# Altium PCB PCB1.PcbDoc (part 1 of 2)
Units mm, origin at the board's own origin, x right, y up, seen from the top; angles counter-clockwise.
Board outline 30.3 x 30 mm, 4 copper layers (Top Layer, Layer 1, Layer 2, Bottom Layer), stack 1.52 mm thick; 94 components, 80 nets, 362 pads, 126 vias.
Unrouted connection lines stored in the file: 75.
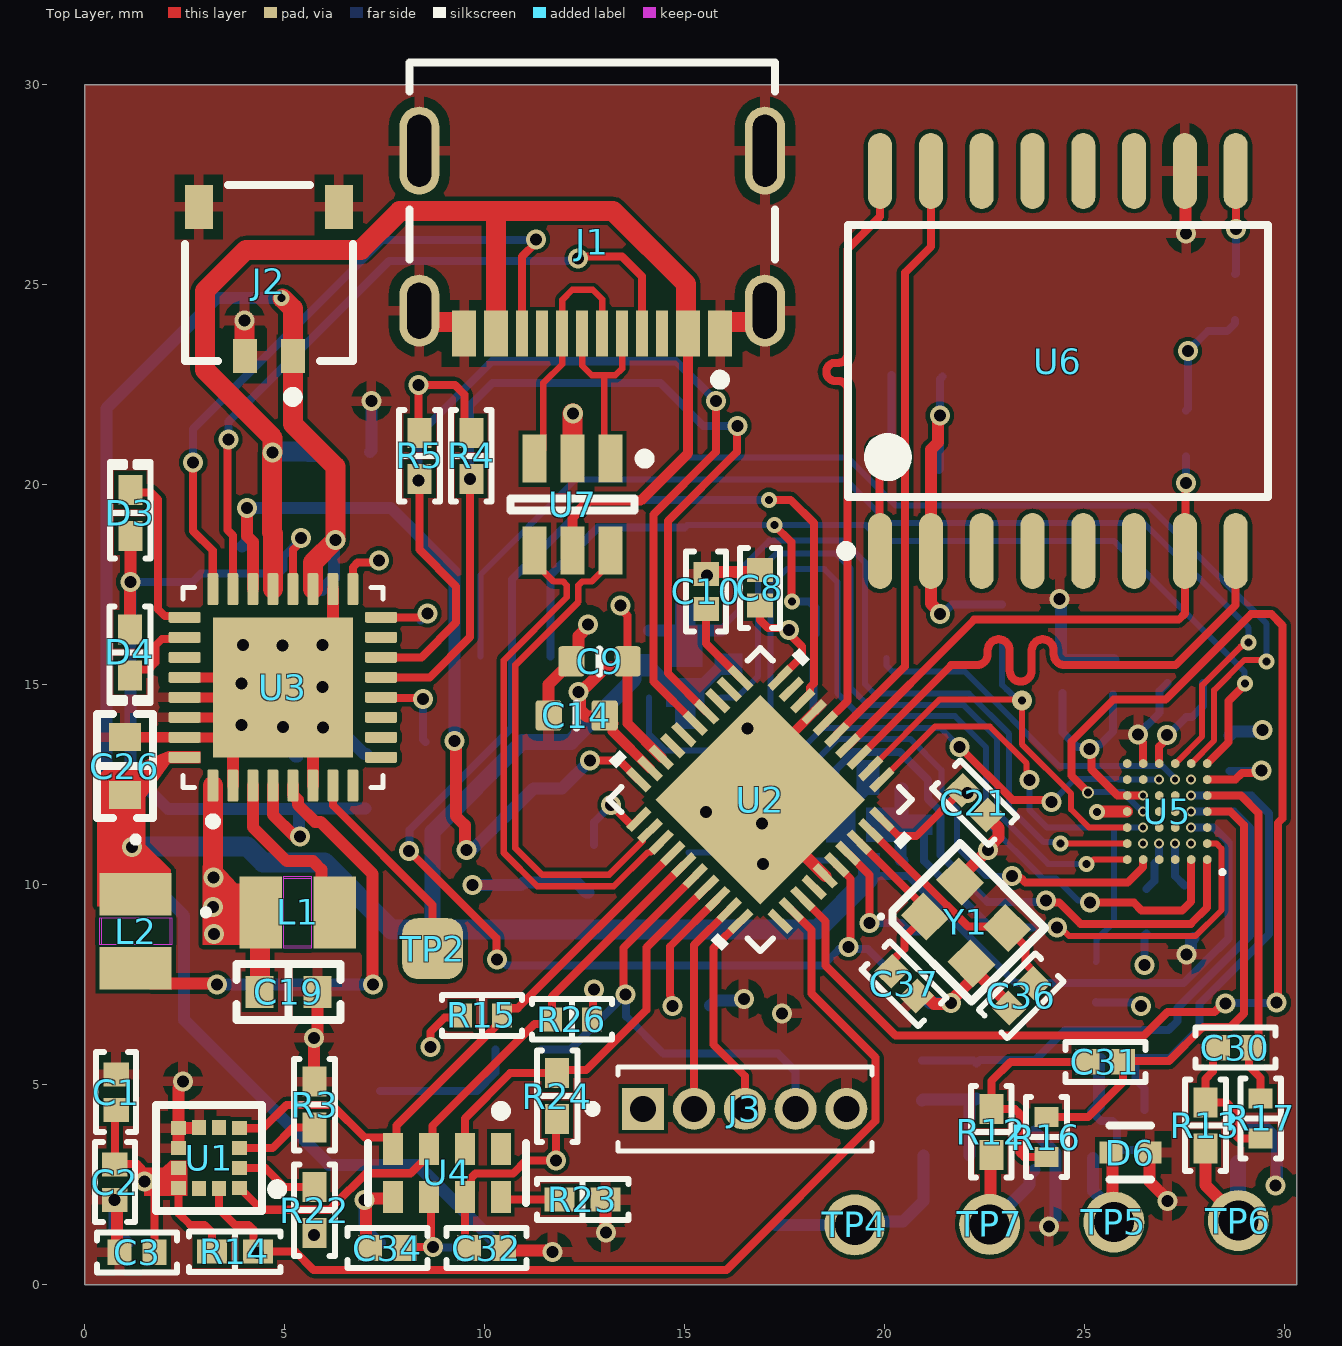
[diagram p0: Top Layer view]
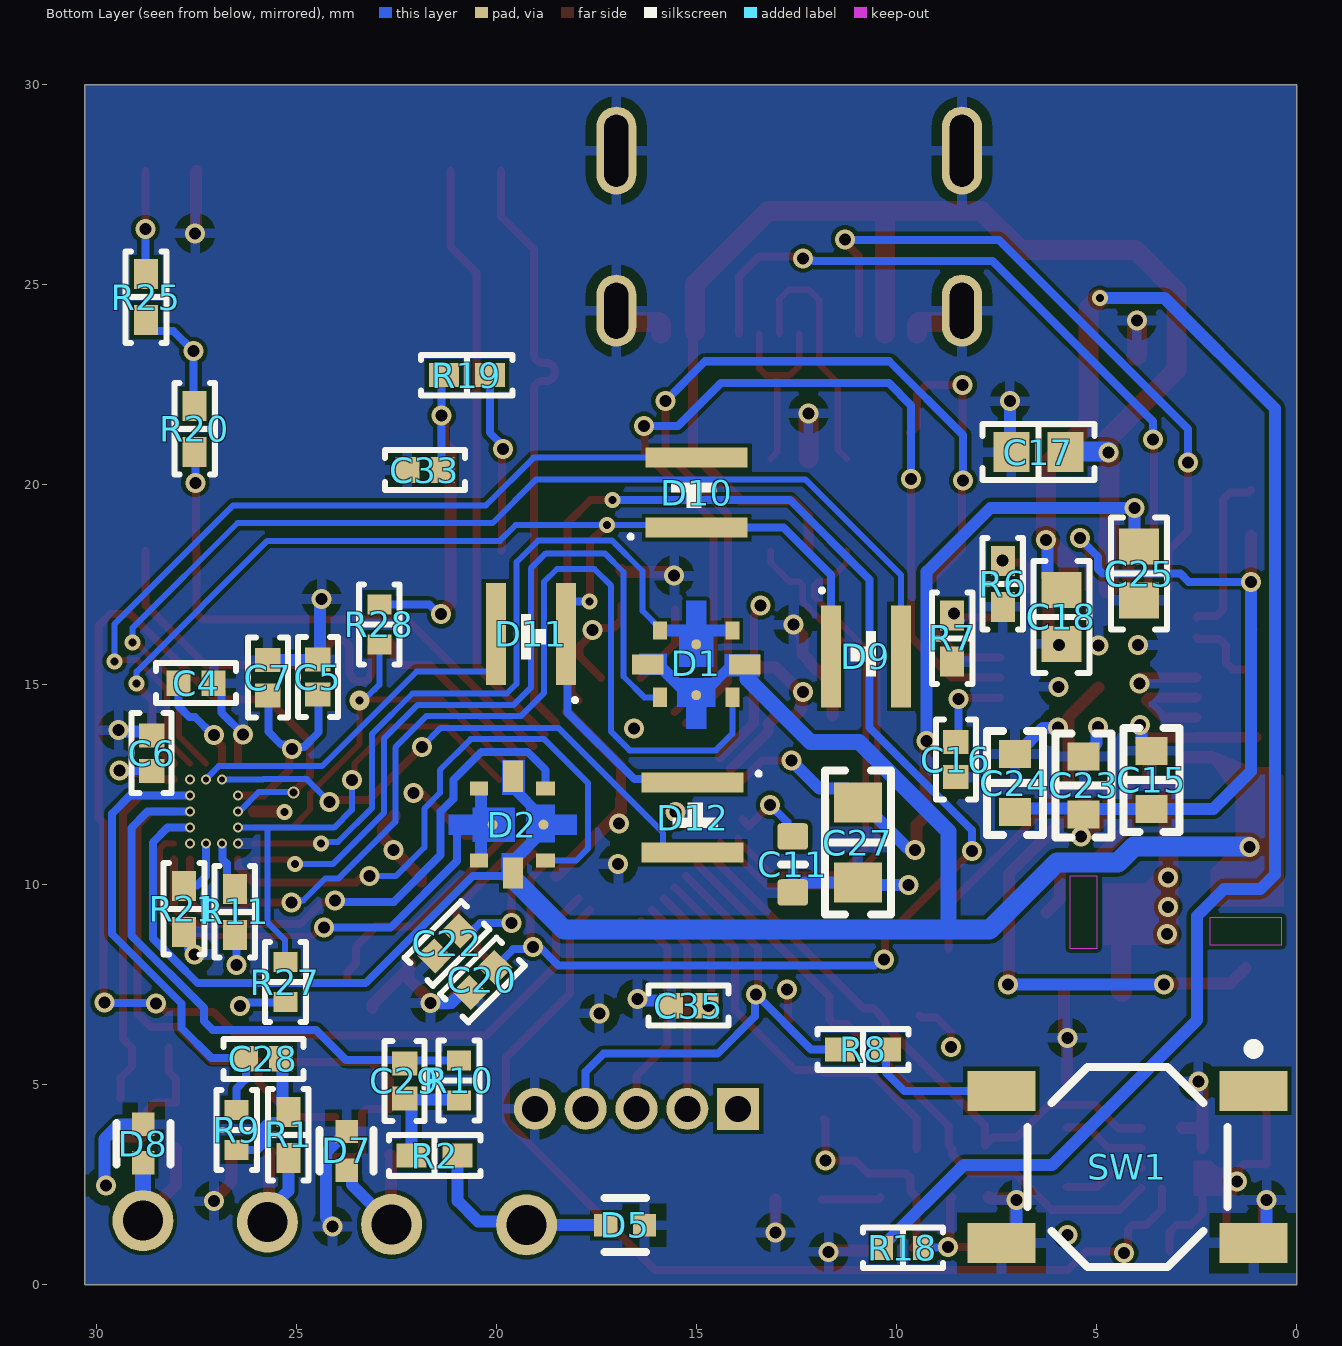
[diagram p1: Bottom Layer view, seen from below]
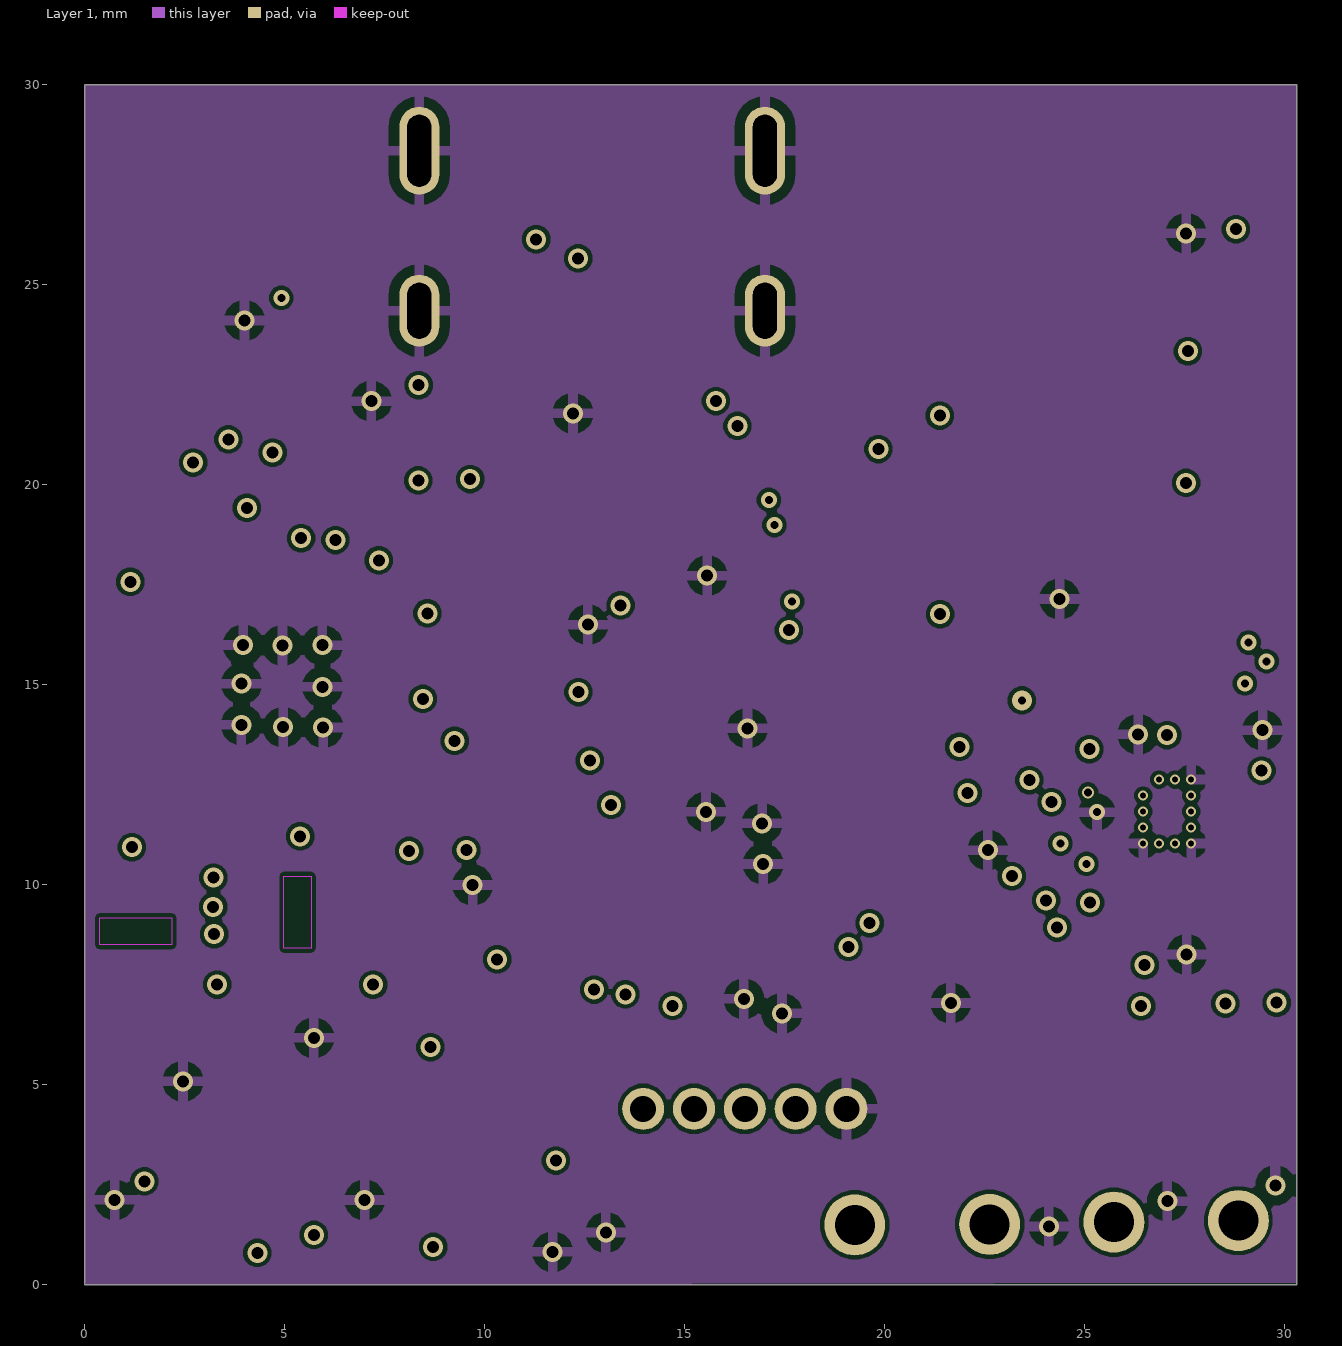
[diagram p2: Layer 1]
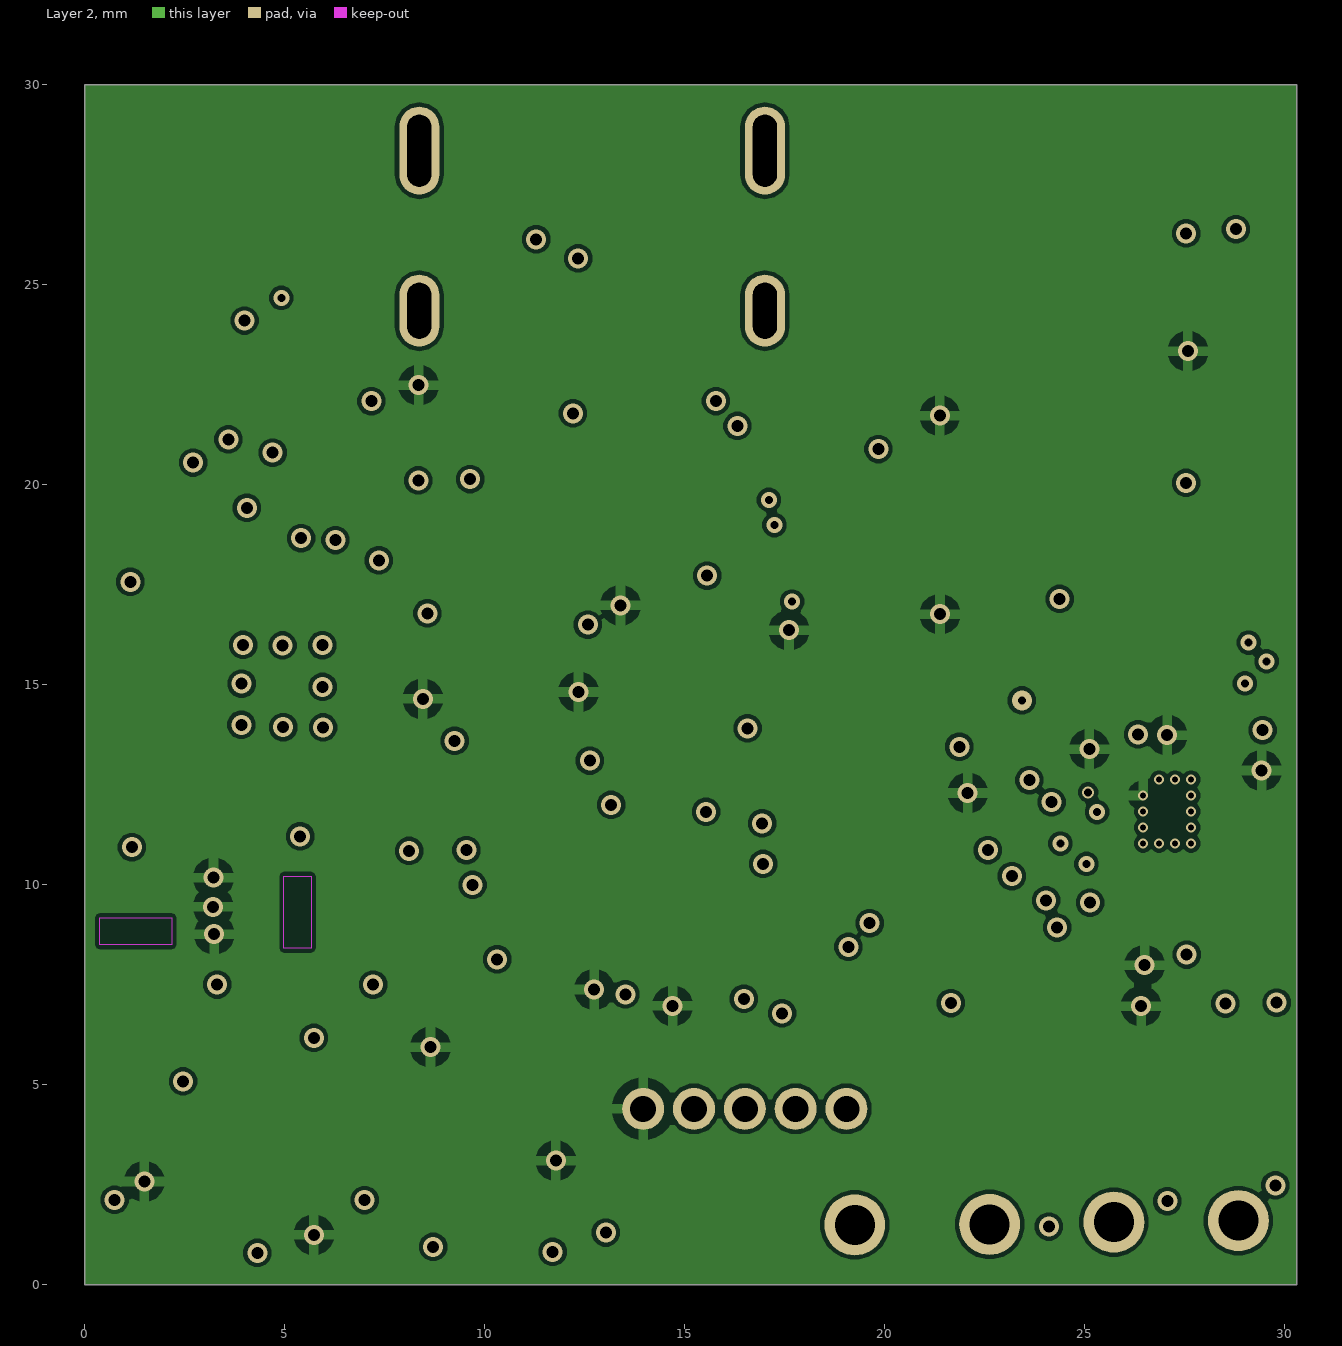
[diagram p3: Layer 2]

## Layer stack, top to bottom
Top Solder: solder mask 0.0102, Solder Resist, Dk 3.5
Top Layer: signal copper 0.035
Dielectric 2: prepreg 0.21, PP-006, Dk 4.1
Layer 1: signal copper 0.015
Dielectric 1: dielectric 1, FR-4, Dk 4.8
Layer 2: signal copper 0.015
Dielectric 3: prepreg 0.21, PP-006, Dk 4.1
Bottom Layer: signal copper 0.035
Bottom Solder: solder mask 0.0102, Solder Resist, Dk 3.5

## Board outline
0,0 30.3,0 30.3,30 0,30

## Design rules (kind name [scope] priority, off if disabled: settings)
Clearance [All] p1: gap=0.1 ignorepadtopadclearanceinfootprint=FALSE except(0.09: Arc-SMDPad Track-SMDPad SMDPad-SMDPad)
ComponentClearance [All] p1: gap=0.102 collisioncheckmode=3 verticalgap=0.102 showdistances=FALSE
DiffPairsRouting [All] p1: maxlimit=0.254 minlimit=0.114 mostfreqgap=0.254 toplayer_maxgap=0.14 toplayer_prefgap=0.127 toplayer_minwidth=0.161 toplayer_maxwidth=0.17 toplayer_prefwidth=0.161 midlayer1_mingap=0.254 midlayer1_minwidth=0.381 midlayer1_maxwidth=0.381 midlayer1_prefwidth=0.381 midlayer2_mingap=0.254 midlayer2_minwidth=0.381 midlayer2_maxwidth=0.381 midlayer2_prefwidth=0.381 bottomlayer_mingap=0.254 bottomlayer_minwidth=0.381 bottomlayer_maxwidth=0.381 bottomlayer_prefwidth=0.381 maxuncoupledlength=12.7
HoleToHoleClearance [All] p1: gap=0.2 allowstackedmicrovias=TRUE
MinimumSolderMaskSliver [All] p1: minsoldermaskwidth=0.1
PolygonConnect [All] p1: connectstyle=Relief reliefconductorwidth=0.254 reliefentries=4 polygonreliefangle="90 Angle" airgapwidth=0.254
RoutingVias microVIa [IsMicroVia] p1: holewidth=0.15 width=0.25 viastyle="Through Hole" minholewidth=0.711 minwidth=1.27 maxholewidth=0.711 maxwidth=1.27
RoutingVias [All] p2: holewidth=0.3 width=0.4 viastyle="Through Hole" minholewidth=0.15 minwidth=0.25 maxholewidth=6.3 maxwidth=7
SilkToSolderMaskClearance [IsPad] p1: minsilkscreentomaskgap=0.1 clearancetoexposedcopper=TRUE
SolderMaskExpansion [All] p1: expansion=0.01 istentingtop=FALSE
SupplyNets "Schematic Supply Nets_4" [InNet('GND')] p1: voltage=0.000
SupplyNets "Schematic Supply Nets_6" [InNet('VBUSOUT')] p2: voltage=0.000
SupplyNets "Schematic Supply Nets_5" [InNet('+5V')] p3: voltage=0.000
SupplyNets "Schematic Supply Nets_3" [InNet('VBAT')] p4: voltage=0.000
SupplyNets "Schematic Supply Nets_2" [InNet('+1.8V_Acc')] p5: voltage=0.000
SupplyNets "Schematic Supply Nets_1" [InNet('V_LED')] p6: voltage=0.000
SupplyNets "Schematic Supply Nets" [InNet('VSYS')] p7: voltage=0.000
Width [All] p1: maxlimit=7 minlimit=0.1 preferedwidth=0.254
25 further rules are at their usual default settings.

## Classes and differential pairs
component class U_Sensors: C1 C2 C3 C4 C5 C6 C7 C28 C29 C30 C31 D1 D2 D5 D6 D7 D8 D9 D10 D11 D12 R1 R2 R3 R9 R10 R11 R12 R13 R14 R15 R16 R17 R21 R22 R26 R27 R28 TP4 TP5 TP6 TP7 U1 U5
component class U_Power: C15 C16 C17 C18 C19 C23 C24 C25 C26 D3 D4 J2 L1 L2 R4 R5 R6 R7 TP2 U3
component class U_MCU: C8 C9 C10 C11 C14 C20 C21 C22 C27 C32 C33 C34 C35 C36 C37 J1 J3 R8 R18 R19 R20 R23 R24 R25 SW1 U2 U4 U6 U7 Y1

## Components (designator, comment, footprint, x,y, rotation, side; value= is the part's Value field where it differs from the comment)
C1 "0.1 µF" "CAP 0402_1005"#1 0.785,4.812 r270 top
C2 "10 µF" "CAP 0402_1005"#1 0.753,2.561 r90 top
C3 "0.1 µF" "CAP 0402_1005"#1 1.311,0.809 r180 top
C4 "0.1 µF" "CAP 0402_1005"#1 27.516,15.039 r0 bottom
C5 "0.1 µF" "CAP 0402_1005"#1 24.468,15.19 r270 bottom
C6 "0.1 µF" "CAP 0402_1005"#1 28.626,13.287 r270 bottom
C7 "1 µF" "CAP 0402_1005"#1 25.72,15.174 r270 bottom
C8 "0.1 µF" "CAP 0402_1005"#2 16.883,17.422 r270 top
C9 "Capacitor 1µF +/-40% 50V 0603" CAPC0603(1608)100_L 12.871,15.581 r0 top value=4.7uF
C10 "0.1 µF" "CAP 0402_1005"#2 15.535,17.331 r270 top
C11 "Capacitor 1µF +/-40% 50V 0603" CAPC0603(1608)100_L 12.597,10.505 r90 bottom value=4.7uF
C14 "Capacitor 1µF +/-40% 50V 0603" CAPC0603(1608)100_L 12.298,14.229 r0 top value=4.7uF
C15 "10 µF" "MURATA GRT188 0603_1608" 3.624,12.621 r270 bottom
C16 "0.1 µF" "CAP 0402_1005"#1 8.519,13.125 r90 bottom
C17 "1µF" "CAP 0603_1608" 6.457,20.814 r180 bottom
C18 "2.2 µF" "CAP 0603_1608" 5.884,16.697 r90 bottom
C19 "10 µF" "MURATA GRT188 0603_1608" 5.097,7.322 r180 top
C20 "100pF" "CAP 0402_1005"#1 20.356,7.619 r135 bottom
C21 "0.1 µF" "CAP 0402_1005"#1 22.248,12.049 r135 top
C22 "0.1 µF" "CAP 0402_1005"#1 21.24,8.53 r135 bottom
C23 "10 µF" "MURATA GRT188 0603_1608" 5.325,12.48 r270 bottom
C24 "10 µF" "MURATA GRT188 0603_1608" 7.043,12.541 r270 bottom
C25 "1µF" "CAP 0603_1608" 3.939,17.777 r90 bottom
C26 "10 µF" "MURATA GRT188 0603_1608" 1.009,12.961 r270 top
C27 "4.7 µF" "MURATA GRM188 0603_1608" 10.97,11.054 r90 bottom
C28 "0.047 µF" "CAP 0402_1005"#1 25.832,5.647 r180 bottom
C29 "0.047 µF" "CAP 0402_1005"#1 22.299,5.092 r270 bottom
C30 "0.047 µF" "CAP 0402_1005"#1 28.771,5.925 r180 top
C31 "0.047 µF" "CAP 0402_1005"#1 25.517,5.569 r180 top
C32 "0.1 µF" "CAP 0402_1005"#1 10.047,0.915 r180 top
C33 "0.1 µF" "CAP 0402_1005"#1 21.793,20.366 r180 bottom
C34 "0.1 µF" "CAP 0402_1005"#1 7.574,0.915 r0 top
C35 "0.1 µF" "CAP 0402_1005"#1 15.198,6.973 r180 bottom
C36 "12 pF" "CAP 0402_1005"#1 23.416,7.224 r45 top
C37 "12 pF" "CAP 0402_1005"#1 20.486,7.524 r135 top
D1 "SFH 7018A" "SFH 7018A-Footprint-1" 15.01,15.5 r180 bottom
D2 "SFH 7018A" "SFH 7018A-Footprint-1" 19.592,11.5 r90 bottom
D3 "Blue" "LED 0402_1005 GREEN" 1.14,19.293 r90 top value=Green
D4 "Green" "LED 0402_1005 GREEN" 1.133,15.808 r270 top
D5 "PGB1010402KR" FP-PGB1-0402-MFG 16.785,1.486 r0 bottom value=0.04pF
D6 "PGB1010402KR" FP-PGB1-0402-MFG 26.142,3.303 r180 top value=0.04pF
D7 "PGB1010402KR" FP-PGB1-0402-MFG 23.75,3.345 r270 bottom value=0.04pF
D8 "PGB1010402KR" FP-PGB1-0402-MFG 28.831,3.527 r270 bottom value=0.04pF
D9 "SFH2705" DFN175P215X60-2N 10.77,15.706 r180 bottom
D10 "SFH2705" DFN175P215X60-2N 15,19.8 r90 bottom
D11 "SFH2705" DFN175P215X60-2N 19.143,16.263 r0 bottom
D12 "SFH2705" DFN175P215X60-2N 15.1,11.675 r270 bottom
J1 "217179-0001" FP-2171790001-MFG 12.687,27.2 r180 top locked
J2 "BM02B-ACHLKS-GAN-ETF(LF)(SN)" FP-BM02B-ACHLKS-GAN-ETF_L-MFG 4.603,25.295 r270 top
J3 "M50-3530542" HARWIN_M50-3530542 16.504,4.395 r0 top
L1 "CIGT201610EH2R2MNE" IND_CIGT2016_SAM 5.327,9.308 r0 top
L2 "CIGT201610EH2R2MNE" IND_CIGT2016_SAM 1.275,8.835 r270 top
R1 "5.1 kOhms" "RES 0402_1005" 25.21,3.746 r270 bottom
R2 "5.1 kOhms" "RES 0402_1005" 21.549,3.227 r180 bottom
R3 "10 kOhms" "RES 0402_1005" 5.746,4.502 r90 top
R4 "10 kOhms" "RES 0402_1005" 9.666,20.719 r270 top
R5 "10 kOhms" "RES 0402_1005" 8.372,20.717 r270 top
R6 "47 kOhms" "RES 0402_1005" 7.344,17.519 r90 bottom
R7 "47 kOhms" "RES 0402_1005" 8.611,16.155 r90 bottom
R8 "10 kOhms" "RES 0402_1005" 10.841,5.879 r0 bottom
R9 "100 kOhms" "YAGEO RES 0402_1005" 26.501,3.868 r270 bottom
R10 "100 kOhms" "YAGEO RES 0402_1005" 20.94,5.106 r270 bottom
R11 "10 kOhms" "RES 0402_1005" 26.547,9.321 r270 bottom
R12 "5.1 kOhms" "RES 0402_1005" 22.667,3.822 r270 top
R13 "5.1 kOhms" "RES 0402_1005" 28.021,3.982 r270 top
R14 "10 kOhms" "RES 0402_1005" 3.753,0.826 r180 top
R15 "4.7 kOhms" "YAGEO RES 0402_1005" 9.932,6.729 r180 top
R16 "100 kOhms" "YAGEO RES 0402_1005" 24.045,3.687 r270 top
R17 "100 kOhms" "YAGEO RES 0402_1005" 29.4,4.155 r270 top
R18 "1 kOhms" "YAGEO RES 0402_1005" 9.845,0.919 r180 bottom
R19 "10 kOhms" "RES 0402_1005" 20.745,22.735 r0 bottom
R20 "10 kOhms" "RES 0402_1005" 27.548,21.393 r90 bottom
R21 "10 kOhms" "RES 0402_1005" 27.815,9.396 r90 bottom
R22 "10 kOhms" "RES 0402_1005" 5.746,1.864 r90 top
R23 "10 kOhms" "RES 0402_1005" 12.45,2.13 r180 top
R24 "10 kOhms" "RES 0402_1005" 11.815,4.711 r90 top
R25 "10 kOhms" "RES 0402_1005" 28.765,24.685 r90 bottom
R26 "4.7 kOhms" "YAGEO RES 0402_1005" 12.183,6.633 r0 top
R27 "4.7 kOhms" "YAGEO RES 0402_1005" 25.28,7.561 r270 bottom
R28 "4.7 kOhms" "YAGEO RES 0402_1005" 22.934,16.504 r90 bottom
SW1 "C913778" ESWI-TL3342F160QG_V 4.23,2.943 r270 bottom
TP2 "TP 1.54" TP-Footprint-1#1 37.8,21.3 r90 top
TP4 "TP THT 1.54" TP-Footprint-1#2 18.252,1.532 r90 top
TP5 "TP THT 1.54" TP-Footprint-1#3 22.636,1.6 r90 top
TP6 "TP THT 1.54" TP-Footprint-1#4 28.76,2.049 r90 top
TP7 "TP THT 1.54" TP-Footprint-1#5 25.127,1.477 r90 top
U1 "LIS2DS12TR" FP-LGA12_8566956-MFG 3.112,3.16 r180 top
U2 "NRF52833-QDAA-R7" QFN40_5X5_DQ_NOR 16.891,12.126 r315 top locked
U3 "NPM1304-QEAA-R7" QFN50P500X500X90-33N 4.955,14.932 r90 top locked
U4 "RV-3028-C7 32.768kHz 1ppm TA QC" FP-RV-3028-C7_32_768kHz_1-MFG 9.055,2.792 r180 top
U5 "AS7058-BWLM" BGA42C40P6X7_254X282X60 27.063,11.827 r180 top
U6 "IS25WP01GJ-RMLE-TY" SOIC127P1030X265-16N 24.332,23.091 r90 top
U7 "USBLC6-2SC6" STM-SOT23-6L_V 12.2,19.5 r270 top locked
Y1 "32MHz" "ABRACON ABM10" 22.03,9.058 r315 top

## Footprints (in the part's own frame and the unit in brackets; to place one, negate y for a bottom-side part, rotate by r counter-clockwise, add the part's x,y. Pads: shape width x height; smd on the part's side, far side on the other; paste and mask are expansions set on the pad)
"ABRACON ABM10" [mm] "Crystal, 4-Leads, Body 2.00x2.45mm, Pitch 1.65mm, IPC Medium Density"
  rect 0.9x0.8 smd: 1(-0.825,-0.625) 2(0.825,-0.625) 3(0.825,0.625) 4(-0.825,0.625)
  silkscreen extent -1.65,-1.45 1.5,1.3, body extent -1.27,-1.02 1.28,1.03, height 0.5
BGA42C40P6X7_254X282X60 [mm] "BGA, 42-Leads, Body 2.55x2.82mmx0.60mm, Pitch 0.40mm"
  round 0.22 smd: A1(-1,1.2) A2(-0.6,1.2) A3(-0.2,1.2) A4(0.2,1.2) A5(0.6,1.2) A6(1,1.2) B1(-1,0.8) B2(-0.6,0.8) B3(-0.2,0.8) B4(0.2,0.8) B5(0.6,0.8) B6(1,0.8) C1(-1,0.4) C2(-0.6,0.4) C3(-0.2,0.4) C4(0.2,0.4) C5(0.6,0.4) C6(1,0.4) D1(-1,0) D2(-0.6,0) D3(-0.2,0) D4(0.2,0) D5(0.6,0) D6(1,0) E1(-1,-0.4) E2(-0.6,-0.4) E3(-0.2,-0.4) E4(0.2,-0.4) E5(0.6,-0.4) E6(1,-0.4) F1(-1,-0.8) F2(-0.6,-0.8) F3(-0.2,-0.8) F4(0.2,-0.8) F5(0.6,-0.8) F6(1,-0.8) G1(-1,-1.2) G2(-0.6,-1.2) G3(-0.2,-1.2) G4(0.2,-1.2) G5(0.6,-1.2) G6(1,-1.2)
  silkscreen extent -1.43,1.47 -1.33,1.56, body extent -1.28,-1.41 1.27,1.41, height 0.6
"CAP 0402_1005"#1 [mm] "Chip Capacitor, 2-Leads, Body 1.02x0.51mm, IPC Medium Density"
  rect 0.6x0.64 smd: 1(-0.44,0) 2(0.44,0)
  silkscreen extent -1,-0.5 1,0.5, body extent -0.5,-0.26 0.5,0.26, height 0.52
"CAP 0402_1005"#2 [mm] "Chip Capacitor, 2-Leads, Body 1.02x0.51mm, IPC Medium Density"
  rect 0.6x0.64 smd mask+0: 1(-0.44,0) 2(0.44,0)
  silkscreen extent -1,-0.5 1,0.5, body extent -0.5,-0.26 0.5,0.26, height 0.52
"CAP 0603_1608" [mm] "Chip Capacitor, 2-Leads, Body 1.60x0.80mm, IPC Medium Density"
  rect 0.9x1 smd: 1(-0.675,0) 2(0.675,0)
  silkscreen extent -1.4,-0.7 1.4,0.7, body extent -0.8,-0.41 0.8,0.41, height 0.82
CAPC0603(1608)100_L [mm] "Chip Capacitor, Body 1.6x0.8mm, Height 1.0mm, IPC High Density"
  rrect25% 0.66x0.76 smd: 1(-0.7,0) 2(0.7,0)
  silkscreen extent 0,-0.3 0,0.3, body extent -0.8,-0.4 0.8,0.4, height 0.95
DFN175P215X60-2N [mm] "DFN, 2-Leads, Body 2.45x2.15mm, Pitch 1.75mm, IPC Medium Density"
  rect 0.5x2.55 smd: 1(0.875,0) 2(-0.875,0)
  silkscreen extent -1.15,-0.51 0.25,1.7, body extent -1.1,-1.25 1.1,1.25, height 0.6
ESWI-TL3342F160QG_V [mm] "SMD, 4-Leads, Body 5x5mm, Pitch 6.3mm"
  rect 1x1.7 smd: 1(-1.9,3.15) 2(-1.9,-3.15) 3(1.9,3.15) 4(1.9,-3.15)
  silkscreen extent -3.07,-2.5 2.5,3.27, body extent -2.5,-2.5 2.5,2.5, height 1.5
FP-2171790001-MFG [mm]
  rrect100% 1x1.8 hole 1.4 slot 0.6 at 0 deg paste-2539.97 mask+0: 1(-4.32,2.85) 2(4.32,2.85)
  rrect100% 1x2.2 hole 1.8 slot 0.6 at 0 deg paste-2539.97 mask+0: 3(-4.32,-1.15) 4(4.32,-1.15)
  rect 0.6x1.15 smd paste+0 mask+0: A1-B12(-3.2,3.425) A4-B9(-2.4,3.425) B1-A12(3.2,3.425) B4-A9(2.4,3.425)
  rect 0.3x1.15 smd paste+0 mask+0: A5(-1.25,3.425) A6(-0.25,3.425) A7(0.25,3.425) A8(1.25,3.425) B5(1.75,3.425) B6(0.75,3.425) B7(-0.75,3.425) B8(-1.75,3.425)
  silkscreen extent -4.57,-3.35 4.57,4.7, body extent -4.92,-3.45 4.92,4.1, height 0.25
FP-BM02B-ACHLKS-GAN-ETF_L-MFG [mm]
  rect 0.85x0.6 smd paste+0 mask+0: 1(2.075,0.6) 2(2.075,-0.6)
  rect 1.1x0.7 smd paste+0 mask+0: 3(-1.65,1.75) 4(-1.65,-1.75)
  silkscreen extent -2.2,-2.1 3.22,2.1, body extent -2.3,-2.2 2.6,2.2, height 0.25
FP-LGA12_8566956-MFG [mm]
  rect 0.375x0.35 smd paste-1000 mask+0: 1(-0.763,0.75) 2(-0.763,0.25) 3(-0.763,-0.25) 4(-0.763,-0.75) 7(0.763,-0.75) 8(0.763,-0.25) 9(0.763,0.25) 10(0.763,0.75)
  rect 0.35x0.375 smd paste-1000 mask+0: 5(-0.25,-0.763) 6(0.25,-0.763) 11(0.25,0.763) 12(-0.25,0.763)
  silkscreen extent -1.83,-1.33 1.33,1.33, body extent -1.55,-1.55 1.55,1.55, height 0.25
FP-PGB1-0402-MFG [mil]
  rect 23x22 smd paste+0 mask+0: 1(-19,0) 2(19,0)
  silkscreen extent -20,-27 20,27, body extent -19,-10 19,10, height 15
FP-RV-3028-C7_32_768kHz_1-MFG [mm]
  rect 0.5x0.8 smd paste+0 mask+0: 1(-1.35,-0.6) 2(-0.45,-0.6) 3(0.45,-0.6) 4(1.35,-0.6) 5(1.35,0.6) 6(0.45,0.6) 7(-0.45,0.6) 8(-1.35,0.6)
  silkscreen extent -1.97,-1.67 1.97,0.75, body extent -1.7,-1.1 1.7,1.1, height 0.25
HARWIN_M50-3530542 [mm]
  rect 1.05x1.05 / inner round 1.05 / far side rect 1.05x1.05 hole 0.65: 1(-2.54,0)
  round 1.05 hole 0.65: 2(-1.27,0) 3(0,0) 4(1.27,0) 5(2.54,0)
  silkscreen extent -3.9,-1.05 3.17,1.05, body extent -3.17,-1.05 3.17,1.05, height 4.2
IND_CIGT2016_SAM [mil]
  rect 41.78x71 smd paste+0 mask+0: 1(-36.39,0) 2(36.39,0)
  Top Layer keep-out region: -13.5,-33.5 -13.5,33.5 13.5,33.5 13.5,-33.5
  Keep-Out Layer region: -13.5,-35.5 -13.5,35.5 13.5,35.5 13.5,-35.5
  silkscreen extent -93,-3 -87,3, body extent -44,-36 44,36, height 39
"LED 0402_1005 GREEN" [mm] "Chip Diode, 2-Leads, Body 1.00x0.50mm, IPC Medium Density"
  rect 0.75x0.6 smd: 1(-0.575,0) 2(0.575,0)
  silkscreen extent -1.14,-0.51 1.27,0.51, body extent -0.5,-0.25 0.5,0.25, height 0.21
"MURATA GRM188 0603_1608" [mm] "Chip Capacitor, 2-Leads, Body 1.60x0.80mm"
  rect 1x1.2 smd: 1(-1,0) 2(1,0)
  silkscreen extent -1.8,-0.83 1.8,0.83, body extent -0.9,-0.5 0.9,0.5, height 1
"MURATA GRT188 0603_1608" [mm] "Chip Capacitor, 2-Leads, Body 1.60x0.80mm"
  rect 0.7x0.8 smd: 1(-0.725,0) 2(0.725,0)
  silkscreen extent -1.3,-0.7 1.3,0.7, body extent -0.9,-0.5 0.9,0.5, height 1
QFN40_5X5_DQ_NOR [mm]
  rect 0.706x0.204 smd paste+0 mask+0: 1(-2.499,1.8) 2(-2.499,1.4) 3(-2.499,1) 4(-2.499,0.6) 5(-2.499,0.2) 6(-2.499,-0.2) 7(-2.499,-0.6) 8(-2.499,-1) 9(-2.499,-1.4) 10(-2.499,-1.8) 21(2.499,-1.8) 22(2.499,-1.4) 23(2.499,-1) 24(2.499,-0.6) 25(2.499,-0.2) 26(2.499,0.2) 27(2.499,0.6) 28(2.499,1) 29(2.499,1.4) 30(2.499,1.8)
  rect 0.204x0.706 smd paste+0 mask+0: 11(-1.8,-2.499) 12(-1.4,-2.499) 13(-1,-2.499) 14(-0.6,-2.499) 15(-0.2,-2.499) 16(0.2,-2.499) 17(0.6,-2.499) 18(1,-2.499) 19(1.4,-2.499) 20(1.8,-2.499) 31(1.8,2.499) 32(1.4,2.499) 33(1,2.499) 34(0.6,2.499) 35(0.2,2.499) 36(-0.2,2.499) 37(-0.6,2.499) 38(-1,2.499) 39(-1.4,2.499) 40(-1.8,2.499)
  rect 3.708x3.708 smd paste-1.854 mask+0: 41(0,0)
  silkscreen extent -3.36,-3.36 3.36,3.36, body extent -2.55,-2.55 2.55,2.55, height 0.89
QFN50P500X500X90-33N [mm]
  rrect25% 0.8x0.27 smd paste+0 mask+0.051: 1(-2.455,1.75) 2(-2.455,1.25) 3(-2.455,0.75) 4(-2.455,0.25) 5(-2.455,-0.25) 6(-2.455,-0.75) 7(-2.455,-1.25) 8(-2.455,-1.75) 17(2.455,-1.75) 18(2.455,-1.25) 19(2.455,-0.75) 20(2.455,-0.25) 21(2.455,0.25) 22(2.455,0.75) 23(2.455,1.25) 24(2.455,1.75)
  rrect25% 0.27x0.8 smd paste+0 mask+0.051: 9(-1.75,-2.455) 10(-1.25,-2.455) 11(-0.75,-2.455) 12(-0.25,-2.455) 13(0.25,-2.455) 14(0.75,-2.455) 15(1.25,-2.455) 16(1.75,-2.455) 25(1.75,2.455) 26(1.25,2.455) 27(0.75,2.455) 28(0.25,2.455) 29(-0.25,2.455) 30(-0.75,2.455) 31(-1.25,2.455) 32(-1.75,2.455)
  rect 3.5x3.5 smd paste-0.643 mask+0.051: 33(0,0)
  silkscreen extent -3.45,-2.5 2.5,2.5, body extent -2.5,-2.5 2.5,2.5, height 0.9
"RES 0402_1005" [mm] "Chip Resistor, 2-Leads, Body 1.0x0.5mm, IPC Medium Density"
  rect 0.75x0.6 smd: 1(-0.575,0) 2(0.575,0)
  silkscreen extent -1.14,-0.51 1.14,0.51, body extent -0.5,-0.25 0.5,0.25, height 0.35
"SFH 7018A-Footprint-1" [mm]
  rect 0.35x0.45 smd: 1(0.9,0.85) 7(-0.9,0.85)
  rect 0.78x0.5 smd: 2(1.21,0) 6(-1.21,0)
  rect 0.35x0.48 smd: 3(0.9,-0.815) 5(-0.9,-0.815)
  round 0.25 smd: 4(0,-0.762) 8(0,0.508)
  Top Layer region: -0.25,1.6 0.25,1.6 0.25,1 0.425,1 0.425,-0.05 -0.425,-0.05 -0.425,1 -0.25,1
  Top Layer region: -0.425,-0.42 0.425,-0.42 0.425,-1 0.25,-1 0.25,-1.6 -0.25,-1.6 -0.25,-1 -0.425,-1
  body extent -1.21,-1.27 1.21,1.27, height 0.6
SOIC127P1030X265-16N [mm] "SOIC, 16-Leads, Body 10.29x7.49mm, Pitch 1.27mm, IPC Medium Density"
  oval 1.9x0.6 smd: 1(-4.75,4.445) 2(-4.75,3.175) 3(-4.75,1.905) 4(-4.75,0.635) 5(-4.75,-0.635) 6(-4.75,-1.905) 7(-4.75,-3.175) 8(-4.75,-4.445) 9(4.75,-4.445) 10(4.75,-3.175) 11(4.75,-1.905) 12(4.75,-0.635) 13(4.75,0.635) 14(4.75,1.905) 15(4.75,3.175) 16(4.75,4.445)
  silkscreen extent -4.87,-5.25 3.4,5.42, body extent -3.8,-5.25 3.8,5.25, height 2.65
STM-SOT23-6L_V [mm] "SOT23, 6-Leads, Body 3.05x1.75mm, Pitch 0.95mm"
  rect 1.2x0.6 smd: 1(-1.15,0.95) 2(-1.15,0) 3(-1.15,-0.95) 4(1.15,-0.95) 5(1.15,0) 6(1.15,0.95)
  silkscreen extent -1.27,-1.55 0.15,1.93, body extent -1.6,-1.53 1.6,1.53, height 1.45
TP-Footprint-1#1 [mil]
  rrect50% 60x60 smd: 1(-507.87,1145.66)
TP-Footprint-1#2 [mil]
  round 60 hole 39.37: 1(-1.46,-39.39)
TP-Footprint-1#3 [mil]
  round 60 hole 39.37: 1(-1.46,-121.79)
TP-Footprint-1#4 [mil]
  round 60 hole 39.37: 1(-17.69,-3.22)
TP-Footprint-1#5 [mil]
  round 60 hole 39.37: 1(1.12,98.44)
"YAGEO RES 0402_1005" [mm] "Chip Resistor, 2-Leads, Body 1.0x0.5mm"
  rect 0.5x0.6 smd: 1(-0.5,0) 2(0.5,0)
  silkscreen extent -1,-0.51 1,0.51, body extent -0.5,-0.25 0.5,0.25, height 0.35

## Part data
C1 C3 C5 C6 C22 C32 C33 C34: library part CL05B104KP5VPNC, "CAP CER 100NF 10V X7R 0402", Device Package="0402 (1005 Metric)", Manufacturer="Samsung Electro-Mechanics", Operating Temperature="-55°C ~ 125°C", Ratings=AEC-Q200, Supplier Part Number 1=1276-CL05B104KP5VPNCCT-ND, Temperature Coefficient=X7R, Tolerance=±10%, Voltage - Rated=10V, Applications=Automotive, Capacitance="0.1 µF", ComponentLink1Description=Datasheet, ComponentLink1URL=https://mm.digikey.com/Volume0/opasdata/d220001/medias/docus/5458/CL05B104KP5VPNC_Spec.pdf, ComponentLink2Description="DigiKey Link", ComponentLink2URL=https://www.digikey.com/en/products/detail/samsung-electro-mechanics/CL05B104KP5VPNC/20498482, LastUpdated="2/9/2024 8:03:17 PM", Lifecycle Status=Active, Minimum Order=1, Mounting Type="Surface Mount, MLCC", Package / Case="0402 (1005 Metric)", Packaging=TapeAndReel, Part Number=CL05B104KP5VPNC, partid=56690, Price=0.01, Series=CL, Size / Dimension="0.039\" L x 0.020\" W (1.00mm x 0.50mm)", Supplier 1=DigiKey, Thickness (Max)="0.022\" (0.55mm)"
C2: library part CL05A106MP8NUB8, "CAP CER 10UF 10V X5R 0402", Device Package="0402 (1005 Metric)", Manufacturer="Samsung Electro-Mechanics", Operating Temperature="-55°C ~ 85°C", Supplier Part Number 1=1276-6830-1-ND, Temperature Coefficient=X5R, Tolerance=±20%, Voltage - Rated=10V, Applications="Acoustic Noise Reduction", Capacitance="10 µF", ComponentLink1Description=Datasheet, ComponentLink1URL=http://www.samsungsem.com/kr/support/product-search/mlcc/CL05A106MP8NUB8.jsp, ComponentLink2Description="DigiKey Link", ComponentLink2URL=https://www.digikey.com/en/products/detail/samsung-electro-mechanics/CL05A106MP8NUB8/5961314, LastUpdated="2/9/2024 8:04:38 PM", Lifecycle Status=Active, Minimum Order=1, Mounting Type="Surface Mount, MLCC", Package / Case="0402 (1005 Metric)", Packaging=TapeAndReel, Part Number=CL05A106MP8NUB8, Part Status=Active, partid=1758, Price=0.06, Series=CL, Size / Dimension="0.039\" L x 0.020\" W (1.00mm x 0.50mm)", Supplier 1=DigiKey, Thickness (Max)="0.035\" (0.90mm)"
C4: library part CL05B104KP5VPNC, "CAP CER 100NF 10V X7R 0402", Device Package="0402 (1005 Metric)", Manufacturer="Samsung Electro-Mechanics", Operating Temperature="-55°C ~ 125°C", Ratings=AEC-Q200, Supplier Part Number 1=1276-CL05B104KP5VPNCCT-ND, Temperature Coefficient=X5R, Tolerance=±10%, Voltage - Rated=10V, Applications=Automotive, Capacitance="0.1 µF", ComponentLink1Description=Datasheet, ComponentLink1URL=https://mm.digikey.com/Volume0/opasdata/d220001/medias/docus/5458/CL05B104KP5VPNC_Spec.pdf, ComponentLink2Description="DigiKey Link", ComponentLink2URL=https://www.digikey.com/en/products/detail/samsung-electro-mechanics/CL05B104KP5VPNC/20498482, LastUpdated="2/9/2024 8:03:17 PM", Lifecycle Status=Active, Minimum Order=1, Mounting Type="Surface Mount, MLCC", Package / Case="0402 (1005 Metric)", Packaging=TapeAndReel, Part Number=CL05B104KP5VPNC, partid=56690, Price=0.01, Series=CL, Size / Dimension="0.039\" L x 0.020\" W (1.00mm x 0.50mm)", Supplier 1=DigiKey, Thickness (Max)="0.022\" (0.55mm)"
C7: library part 885012105012, "CAP CER 1UF 10V X5R 0402", Device Package="0402 (1005 Metric)", Manufacturer="Würth Elektronik", Operating Temperature="-55°C ~ 85°C", Supplier Part Number 1=732-7489-1-ND, Temperature Coefficient=X5R, Tolerance=±20%, Voltage - Rated=10V, Applications="General Purpose", Capacitance="1 µF", ComponentLink1Description=Datasheet, ComponentLink1URL=https://katalog.we-online.de/pbs/datasheet/885012105012.pdf, ComponentLink2Description="DigiKey Link", ComponentLink2URL=https://www.digikey.com/en/products/detail/würth-elektronik/885012105012/5453344, LastUpdated="2/9/2024 8:04:38 PM", Lifecycle Status=Active, Minimum Order=1, Mounting Type="Surface Mount, MLCC", Package / Case="0402 (1005 Metric)", Packaging=TapeAndReel, Part Number=885012105012, Part Status=Active, partid=1807, Price=0.16, Series=WCAP-CSGP, Size / Dimension="0.039\" L x 0.020\" W (1.00mm x 0.50mm)", Supplier 1=DigiKey, Thickness (Max)="0.022\" (0.55mm)"
C8 C10 C21 C35: library part CL05B104KP5VPNC, "CAP CER 100NF 10V X7R 0402", Device Package="0402 (1005 Metric)", Manufacturer="Samsung Electro-Mechanics", Operating Temperature="-55°C ~ 125°C", Ratings=AEC-Q200, Supplier Part Number 1=1276-CL05B104KP5VPNCCT-ND, Temperature Coefficient=X7S, Tolerance=±10%, Voltage - Rated=10V, Applications=Automotive, Capacitance="0.1 µF", ComponentLink1Description=Datasheet, ComponentLink1URL=https://mm.digikey.com/Volume0/opasdata/d220001/medias/docus/5458/CL05B104KP5VPNC_Spec.pdf, ComponentLink2Description="DigiKey Link", ComponentLink2URL=https://www.digikey.com/en/products/detail/samsung-electro-mechanics/CL05B104KP5VPNC/20498482, LastUpdated="2/9/2024 8:03:17 PM", Lifecycle Status=Active, Minimum Order=1, Mounting Type="Surface Mount, MLCC", Package / Case="0402 (1005 Metric)", Packaging=TapeAndReel, Part Number=CL05B104KP5VPNC, partid=56690, Price=0.01, Series=CL, Size / Dimension="0.039\" L x 0.020\" W (1.00mm x 0.50mm)", Supplier 1=DigiKey, Thickness (Max)="0.022\" (0.55mm)"
C9 C11 C14: library part CMP-001-00078-4, "Chip Capacitor, 1µF +/-40%, 50V, 0603, Thickness 1 mm", Case/Package=0603, Max Operating Temperature=85°C, Min Operating Temperature=-55°C, Tolerance=10%, Voltage Rating=50V, Mounting Technology=SMT, Pins=2
C15 C19 C23 C24 C26: library part GRT188R61C106ME13D, "CAP CER 10UF 16V X5R 0603", Device Package="0603 (1608 Metric)", Manufacturer="Murata Electronics", Operating Temperature="-55°C ~ 85°C", Ratings=AEC-Q200, Supplier Part Number 1=490-12318-1-ND, Temperature Coefficient=X5R, Tolerance=±20%, Voltage - Rated=16V, Applications=Automotive, Capacitance="10 µF", ComponentLink1Description=Datasheet, ComponentLink1URL=https://search.murata.co.jp/Ceramy/image/img/A01X/G101/ENG/GRT188R61C106ME13-01.pdf, ComponentLink2Description="DigiKey Link", ComponentLink2URL=https://www.digikey.com/en/products/detail/murata-electronics/GRT188R61C106ME13D/5416740, LastUpdated="7/27/2025 6:13:14 AM", Lifecycle Status=Active, Minimum Order=1, Mounting Type="Surface Mount, MLCC", Package / Case="0603 (1608 Metric)", Packaging=TapeAndReel, Part Number=GRT188R61C106ME13D, Part Status=Active, partid=2515, Price=0.06, Series=GRT, Size / Dimension="0.063\" L x 0.031\" W (1.60mm x 0.80mm)", Supplier 1=DigiKey, Thickness (Max)="0.035\" (0.90mm)"
C16: library part CL05B104KP5VPNC, "CAP CER 100NF 10V X7R 0402", Device Package="0402 (1005 Metric)", Manufacturer="Samsung Electro-Mechanics", Operating Temperature="-55°C ~ 125°C", Ratings=AEC-Q200, Supplier Part Number 1=1276-CL05B104KP5VPNCCT-ND, Temperature Coefficient=X5R, Tolerance=±10%, Voltage - Rated=16V, Applications=Automotive, Capacitance="0.1 µF", ComponentLink1Description=Datasheet, ComponentLink1URL=https://mm.digikey.com/Volume0/opasdata/d220001/medias/docus/5458/CL05B104KP5VPNC_Spec.pdf, ComponentLink2Description="DigiKey Link", ComponentLink2URL=https://www.digikey.com/en/products/detail/samsung-electro-mechanics/CL05B104KP5VPNC/20498482, LastUpdated="2/9/2024 8:03:17 PM", Lifecycle Status=Active, Minimum Order=1, Mounting Type="Surface Mount, MLCC", Package / Case="0402 (1005 Metric)", Packaging=TapeAndReel, Part Number=CL05B104KP5VPNC, partid=56690, Price=0.01, Series=CL, Size / Dimension="0.039\" L x 0.020\" W (1.00mm x 0.50mm)", Supplier 1=DigiKey, Thickness (Max)="0.022\" (0.55mm)"
C17: library part 06033D105MAT2A, "CAP CER 1UF 25V X5R 0603", Device Package="0603 (1608 Metric)", Manufacturer="AVX Corporation", Operating Temperature="-55°C ~ 85°C", Supplier Part Number 1=478-4531-1-ND, Temperature Coefficient=X5R, Tolerance=±10%, Voltage - Rated=25V, Applications="General Purpose", Capacitance=1µF, ComponentLink1Description=Datasheet, ComponentLink1URL=http://datasheets.avx.com/cx5r.pdf, ComponentLink2Description="DigiKey Link", ComponentLink2URL=http://digikey.com/product-detail/en/avx-corporation/06033D105MAT2A/478-4531-1-ND/1645882, LastUpdated="9/2/2020 1:03:35 AM", Lifecycle Status=Active, Minimum Order=1, Mounting Type="Surface Mount, MLCC", Package / Case="0603 (1608 Metric)", Packaging=TapeAndReel, Part Number=06033D105MAT2A, Part Status=Active, partid=2656, Price=0.11, Series=-, Size / Dimension="0.063\" L x 0.032\" W (1.60mm x 0.81mm)", Supplier 1=DigiKey, Thickness (Max)="0.035\" (0.90mm)"
C18: library part CGA3E3X5R1A225K080AB, "CAP CER 2.2UF 10V X5R 0603", Device Package="0603 (1608 Metric)", Manufacturer="TDK Corporation", Operating Temperature="-55°C ~ 85°C", Ratings=AEC-Q200, Supplier Part Number 1=445-12444-1-ND, Temperature Coefficient=X7R, Tolerance=±10%, Voltage - Rated=16V, Applications=Automotive, Capacitance="2.2 µF", ComponentLink1Description=Datasheet, ComponentLink1URL=https://product.tdk.com/info/en/catalog/datasheets/mlcc_automotive_general_en.pdf?ref_disty=digikey, ComponentLink2Description="DigiKey Link", ComponentLink2URL=https://www.digikey.com/en/products/detail/tdk-corporation/CGA3E3X5R1A225K080AB/3949680, LastUpdated="2/9/2024 8:10:27 PM", Lifecycle Status=Active, Minimum Order=1, Mounting Type="Surface Mount, MLCC", Package / Case="0603 (1608 Metric)", Packaging=TapeAndReel, Part Number=CGA3E3X5R1A225K080AB, Part Status=Active, partid=4737, Price=0.02, Series=CGA, Size / Dimension="0.063\" L x 0.031\" W (1.60mm x 0.80mm)", Supplier 1=DigiKey, Thickness (Max)="0.035\" (0.90mm)"
C20: library part 04023A101FAT2A, "CAP CER 100PF 25V NP0 0402", Device Package="0402 (1005 Metric)", Manufacturer="AVX Corporation", Operating Temperature="-55°C ~ 125°C", Supplier Part Number 1=478-12607-1-ND, Temperature Coefficient="C0G, NP0", Tolerance=±1%, Voltage - Rated=25V, Applications="General Purpose", Capacitance=100pF, ComponentLink1Description=Datasheet, ComponentLink1URL=http://datasheets.avx.com/C0GNP0-Dielectric.pdf, ComponentLink2Description="DigiKey Link", ComponentLink2URL=http://digikey.com/product-detail/en/avx-corporation/04023A101FAT2A/478-12607-1-ND/9949145, LastUpdated="2/8/2022 12:26:58 PM", Lifecycle Status=Active, Minimum Order=1, Mounting Type="Surface Mount, MLCC", Package / Case="0402 (1005 Metric)", Packaging=TapeAndReel, Part Number=04023A101FAT2A, Part Status=Active, partid=1996, Price=0.11, Series=-, Size / Dimension="0.039\" L x 0.020\" W (1.00mm x 0.50mm)", Supplier 1=DigiKey, Thickness (Max)="0.022\" (0.56mm)"
C25: library part 0603ZD105KAT4A, "CAP CER 1UF 10V X5R 0603", Device Package="0603 (1608 Metric)", Manufacturer="AVX Corporation", Operating Temperature="-55°C ~ 85°C", Supplier Part Number 1=478-12460-1-ND, Temperature Coefficient=X5R, Tolerance=±10%, Voltage - Rated=10V, Applications="General Purpose", Capacitance=1µF, ComponentLink1Description=Datasheet, ComponentLink1URL=http://datasheets.avx.com/cx5r.pdf, ComponentLink2Description="DigiKey Link", ComponentLink2URL=http://digikey.com/product-detail/en/avx-corporation/0603ZD105KAT4A/478-12460-1-ND/9749312, LastUpdated="9/2/2020 1:03:32 AM", Lifecycle Status=Active, Minimum Order=1, Mounting Type="Surface Mount, MLCC", Package / Case="0603 (1608 Metric)", Packaging=TapeAndReel, Part Number=0603ZD105KAT4A, Part Status=Active, partid=4586, Price=0.03, Series=-, Size / Dimension="0.063\" L x 0.032\" W (1.60mm x 0.81mm)", Supplier 1=DigiKey, Thickness (Max)="0.035\" (0.90mm)"
C27: library part GRM188C71A475KE11D, "CAP CER 4.7UF 10V X7S 0603", Device Package="0603 (1608 Metric)", Manufacturer="Murata Electronics", Operating Temperature="-55°C ~ 125°C", Supplier Part Number 1=490-11992-1-ND, Temperature Coefficient=X7S, Tolerance=±10%, Voltage - Rated=10V, Applications="General Purpose", Capacitance="4.7 µF", ComponentLink1Description=Datasheet, ComponentLink1URL=https://search.murata.co.jp/Ceramy/image/img/A01X/G101/ENG/GRM188C71A475KE11-01.pdf, ComponentLink2Description="DigiKey Link", ComponentLink2URL=https://www.digikey.com/en/products/detail/murata-electronics/GRM188C71A475KE11D/4905309, LastUpdated="7/20/2024 12:23:22 AM", Lifecycle Status=Active, Minimum Order=1, Mounting Type="Surface Mount, MLCC", Package / Case="0603 (1608 Metric)", Packaging=TapeAndReel, Part Number=GRM188C71A475KE11D, Part Status=Active, partid=2397, Price=0.03, Series=GRM, Size / Dimension="0.063\" L x 0.031\" W (1.60mm x 0.80mm)", Supplier 1=DigiKey, Thickness (Max)="0.037\" (0.95mm)"
C28 C29 C30 C31: library part C0402C473K3REC7867, "CAP CER 0402 47NF 25V X7R 10%", Device Package="0402 (1005 Metric)", Manufacturer=KEMET, Operating Temperature="-55°C ~ 125°C", Supplier Part Number 1=399-C0402C473K3REC7867CT-ND, Temperature Coefficient=X7R, Tolerance=±10%, Voltage - Rated=25V, Applications="ESD Protection", Capacitance="0.047 µF", ComponentLink1Description=Datasheet, ComponentLink1URL=https://api.kemet.com/component-edge/download/datasheet/C0402C473K3REC7867.pdf, ComponentLink2Description="DigiKey Link", ComponentLink2URL=https://www.digikey.com/en/products/detail/kemet/C0402C473K3REC7867/8643594, LastUpdated="2/9/2024 8:04:15 PM", Lifecycle Status=Active, Minimum Order=1, Mounting Type="Surface Mount, MLCC", Package / Case="0402 (1005 Metric)", Packaging=TapeAndReel, Part Number=C0402C473K3REC7867, Part Status=Active, partid=33555, Price=0.01, Series="ESD SMD Comm X7R", Size / Dimension="0.039\" L x 0.020\" W (1.00mm x 0.50mm)", Supplier 1=DigiKey, Thickness (Max)="0.022\" (0.55mm)"
C36 C37: library part CBR04C120F5GAC, "CAP CER 12PF 50V C0G/NP0 0402", Device Package="0402 (1005 Metric)", Manufacturer=KEMET, Operating Temperature="-55°C ~ 125°C", Supplier Part Number 1=399-8815-1-ND, Temperature Coefficient="C0G, NP0", Tolerance=±1%, Voltage - Rated=50V, Applications="RF, Microwave, High Frequency", Capacitance="12 pF", ComponentLink1Description=Datasheet, ComponentLink1URL=https://api.kemet.com/component-edge/download/datasheet/CBR04C120F5GAC.pdf, ComponentLink2Description="DigiKey Link", ComponentLink2URL=https://www.digikey.com/en/products/detail/kemet/CBR04C120F5GAC/3479654, Features="High Q, Low Loss, Ultra Low ESR", LastUpdated="2/9/2024 8:04:38 PM", Lifecycle Status=Active, Minimum Order=1, Mounting Type="Surface Mount, MLCC", Package / Case="0402 (1005 Metric)", Packaging=TapeAndReel, Part Number=CBR04C120F5GAC, Part Status=Active, partid=1750, Price=0.06, Series="CBR-SMD RF C0G", Size / Dimension="0.039\" L x 0.020\" W (1.00mm x 0.50mm)", Supplier 1=DigiKey, Thickness (Max)="0.022\" (0.55mm)"
D1 D2: library part CMP-007-00036-4, "Led, Hr/ir/tg, 655/940/532NM, 120DEG Rohs Compliant: Yes", Colour="Green, Red, IR"
D3: library part SM0402PGC, "LED GREEN CLEAR 0402 SMD", Color=Green, Current - Test=20mA, Device Package="0402 (1005 Metric)", Lens Color=Colorless, Manufacturer="Bivar Inc.", Millicandela Rating=450mcd, Supplier Device Package=0402, Supplier Part Number 1=492-2204-1-ND, Voltage - Forward (Vf) (Typ)=3.1V, ComponentLink1Description=Datasheet, ComponentLink1URL=https://www.bivar.com/Files/Datasheets/SM0402PGC.pdf, ComponentLink2Description="DigiKey Link", ComponentLink2URL=https://www.digikey.com/en/products/detail/bivar-inc/SM0402PGC/6810860, Configuration=0402, Height (Max)=0.71mm, LastUpdated="8/25/2025 8:34:13 PM", Lens Size="0.50mm x 1.00mm", Lens Style="Rectangle with Flat Top", Lens Transparency=Clear, Lifecycle Status=Active, Minimum Order=1, Mounting Type="Surface Mount", Package / Case="0402 (1005 Metric)", Packaging=TapeAndReel, Part Number=SM0402PGC, Part Status=Active, partid=699, Price=0.24, Series=-, Size / Dimension="1.00mm L x 0.50mm W", Supplier 1=DigiKey, Viewing Angle=130°, Wavelength - Dominant=525nm, Wavelength - Peak=523nm
D4: library part SM0402PGC, "LED GREEN CLEAR 0402 SMD", Current - Test=20mA, Device Package="0402 (1005 Metric)", Lens Color=Colorless, Manufacturer="Bivar Inc.", Millicandela Rating=450mcd, Supplier Device Package=0402, Supplier Part Number 1=492-2204-1-ND, Voltage - Forward (Vf) (Typ)=3.1V, Color=Green, ComponentLink1Description=Datasheet, ComponentLink1URL=https://www.bivar.com/Files/Datasheets/SM0402PGC.pdf, ComponentLink2Description="DigiKey Link", ComponentLink2URL=https://www.digikey.com/en/products/detail/bivar-inc/SM0402PGC/6810860, Configuration=0402, Height (Max)=0.71mm, LastUpdated="8/25/2025 8:34:13 PM", Lens Size="0.50mm x 1.00mm", Lens Style="Rectangle with Flat Top", Lens Transparency=Clear, Lifecycle Status=Active, Minimum Order=1, Mounting Type="Surface Mount", Package / Case="0402 (1005 Metric)", Packaging=TapeAndReel, Part Number=SM0402PGC, Part Status=Active, partid=699, Price=0.24, Series=-, Size / Dimension="1.00mm L x 0.50mm W", Supplier 1=DigiKey, Viewing Angle=130°, Wavelength - Dominant=525nm, Wavelength - Peak=523nm
D5 D6 D7 D8: library part CMP-2000-05189-2, "TVS DIODE 12V 250V 0402", Capacitance=0.04pF, Clamping Voltage=250V, Manufacturer=Littelfuse, Package=PGB1-0402, Temperature="-65°C to +125°C", Temperature Range High=+125°C, Temperature Range Low=-65°C, Automotive=No, Category=Diode, ComponentLink2Description=Datasheet, ComponentLink2URL=https://www.littelfuse.com/~/media/electronics/datasheets/pulseguard_esd_suppressors/littelfuse_pulseguard_pgb1_datasheet.pdf.pdf, Device Class L1="Circuit Protection", Device Class L2="TVS Diodes", Device Class L3=unset, Digikey Description="TVS DIODE 12V 250V 0402", Direction=Bidirectional, Height=0.39mm, Ipc Land Pattern Name=DIOC9951X31, Lead Free=Yes, Manufacturer Part Number=PGB1010402KR, Mouser Description="ESD Suppressors / TVS Diodes PULSEGUARD 0402 ESD SUPPRESSOR", Number Of Channels=1, Octopart=https://octopart.com/pgb1010402kr-littelfuse-10444990, RoHS=TRUE
D9 D10 D11 D12: library part CMP-00026-00001-2, "Photodiode with wide range of wavelength"
J1: library part CMP-04767-000028-2, "CONN RCP USB2.0 TYP C 24P SMD RA", Current Rating=1.25A, Max Operating Temperature=85°C, Min Operating Temperature=-40°C, Voltage Rating=30V, Contact Material="Gold, Nickel", Gender=Receptacle, Height=3.36mm, NexarPartId=117190526, Number of Contacts=16, USB Standard="USB 2.0"
J2: library part CMP-17439-000451-1, "CONN HEADER SMD R/A 2POS 1.2MM", Color=Black, Flammability Rating="UL94 V-0", Max Operating Temperature=85°C, Min Operating Temperature=-25°C, Voltage Rating=50V, Connector Type=Header, Contact Finish - Mating=GOLD, Contact Material="Copper Alloy", Contact Plating=Gold, Contact Shape=Rectangular, Contact Type="Male Blade", Fastening Type=Detent, Insulation Color=Black, Insulation Material=Thermoplastic, Lead Free="Lead Free", Mount="Surface Mount", Number of Pins=2, Number of Positions=2, Number of Rows=1, Packaging="Cut Tape", Pitch=0.047inch, Series=ACHL, Termination=Solder
J3: library part CMP-002-00071-1, "1.27mm (0.05) Pitch SIL Vertical Throughboard Pin Header, selective gold + tin, 5 contacts", Case/Package=None, Check_prices=https://www.snapeda.com/parts/M50-3530542/Harwin/view-part/?ref=eda, Component Type=Standard, Design Item ID=M50-3530542, MF=Harwin, MP=M50-3530542, Pins=5, SnapEDA_Link=https://www.snapeda.com/parts/M50-3530542/Harwin/view-part/?ref=snap, Source=M50-3530542.SchLib
L1 L2: library part CMP-006-00022-1, "Description", Manufacturer_Name=Samsung, Copyright="Copyright (C) 2025 Ultra Librarian. All rights reserved.", Design Item ID=CIGT201610EH2R2MNE, Manufacturer_Part_Number=CIGT201610EH2R2MNE, Source=CIGT201610EH2R2MNE.SchLib
R1 R2 R12 R13: library part ERJ-PA2F5101X, "RES 5.1K OHM 1% 1/4W 0402", Device Package="0402 (1005 Metric)", Manufacturer="Panasonic Electronic Components", Operating Temperature="-55°C ~ 155°C", Power (Watts)="0.25W, 1/4W", Ratings=AEC-Q200, Supplier Device Package=402, Supplier Part Number 1=P124488CT-ND, Temperature Coefficient=±100ppm/°C, Tolerance=±1%, ComponentLink1Description=Datasheet, ComponentLink1URL=https://industrial.panasonic.com/cdbs/www-data/pdf/RDO0000/AOA0000C331.pdf, ComponentLink2Description="DigiKey Link", ComponentLink2URL=https://www.digikey.com/en/products/detail/panasonic-electronic-components/ERJ-PA2F5101X/9815254, Composition="Thick Film", Features="Automotive AEC-Q200, Pulse Withstanding", Height - Seated (Max)="0.016\" (0.40mm)", LastUpdated="2/9/2024 8:30:01 PM", Lifecycle Status=Active, Minimum Order=1, Number of Terminations=2, Package / Case="0402 (1005 Metric)", Packaging=TapeAndReel, Part Number=ERJ-PA2F5101X, Part Status=Active, partid=8439, Price=0.02, Resistance="5.1 kOhms", Series=ERJ-PA2, Size / Dimension="0.039\" L x 0.020\" W (1.00mm x 0.50mm)", Supplier 1=DigiKey
R3 R4 R5 R8 R11 R14 R19 R20 R22 R23 R24 R25: library part RP73PF1E10KBTD, "RES 10K OHM 0.1% 1/10W 0402", Device Package="0402 (1005 Metric)", Manufacturer="TE Connectivity Passive Product", Operating Temperature="-55°C ~ 155°C", Power (Watts)="0.1W, 1/10W", Supplier Device Package=0402, Supplier Part Number 1=A127415CT-ND, Temperature Coefficient=±25ppm/°C, Tolerance=±1%, ComponentLink1Description=Datasheet, ComponentLink1URL=https://www.te.com/commerce/DocumentDelivery/DDEController?Action=srchrtrv&DocNm=1773272&DocType=DS&DocLang=English, ComponentLink2Description="DigiKey Link", ComponentLink2URL=https://www.digikey.com/en/products/detail/te-connectivity-passive-product/RP73PF1E10KBTD/8260957, Composition="Thin Film", Height - Seated (Max)="0.014\" (0.35mm)", LastUpdated="2/9/2024 8:30:24 PM", Lifecycle Status=Active, Minimum Order=1, Number of Terminations=2, Package / Case="0402 (1005 Metric)", Packaging=TapeAndReel, Part Number=RP73PF1E10KBTD, Part Status=Active, partid=2434, Price=0.08, Resistance="10 kOhms", Series="RP73, Holsworthy", Size / Dimension="0.039\" L x 0.020\" W (1.00mm x 0.50mm)", Supplier 1=DigiKey
R6 R7: library part RMCF0402FT47K0, "RES 47K OHM 1% 1/16W 0402", Device Package="0402 (1005 Metric)", Manufacturer="Stackpole Electronics Inc", Operating Temperature="-55°C ~ 155°C", Power (Watts)="0.063W, 1/16W", Ratings=AEC-Q200, Supplier Device Package=0402, Supplier Part Number 1=RMCF0402FT47K0CT-ND, Temperature Coefficient=±100ppm/°C, Tolerance=±1%, ComponentLink1Description=Datasheet, ComponentLink1URL=https://www.seielect.com/catalog/sei-rmcf_rmcp.pdf, ComponentLink2Description="DigiKey Link", ComponentLink2URL=https://www.digikey.com/en/products/detail/stackpole-electronics-inc/RMCF0402FT47K0/1714749, Composition="Thick Film", Features="Automotive AEC-Q200", Height - Seated (Max)="0.016\" (0.40mm)", LastUpdated="2/9/2024 8:30:13 PM", Lifecycle Status=Active, Minimum Order=1, Number of Terminations=2, Package / Case="0402 (1005 Metric)", Packaging=CutTape, Part Number=RMCF0402FT47K0, Part Status=Active, partid=4957, Price=0.01, Resistance="47 kOhms", Series=RMCF, Size / Dimension="0.039\" L x 0.020\" W (1.00mm x 0.50mm)", Supplier 1=DigiKey
R9 R10 R16 R17: library part SR0402FR-7T100KL, "RES 100K OHM 1% 1/5W 0402", Device Package="0402 (1005 Metric)", Manufacturer=Yageo, Operating Temperature="-55°C ~ 155°C", Power (Watts)="0.2W, 1/5W", Ratings=AEC-Q200, Supplier Device Package=0402, Supplier Part Number 1=YAG5813CT-ND, Temperature Coefficient=±100ppm/°C, Tolerance=±1%, ComponentLink1Description=Datasheet, ComponentLink1URL=http://www.yageo.com/documents/recent/PYu-SR_D_F%20tol_RoHS_L_4.pdf, ComponentLink2Description="DigiKey Link", ComponentLink2URL=https://www.digikey.com/en/products/detail/yageo/SR0402FR-7T100KL/9373087, Composition="Thick Film", Features="Automotive AEC-Q200, Pulse Withstanding", Height - Seated (Max)="0.016\" (0.40mm)", LastUpdated="8/31/2025 3:04:17 PM", Lifecycle Status=Active, Minimum Order=1, Number of Terminations=2, Package / Case="0402 (1005 Metric)", Packaging=TapeAndReel, Part Number=SR0402FR-7T100KL, Part Status=Active, partid=4405, Price=0.09, Resistance="100 kOhms", Series=SR, Size / Dimension="0.039\" L x 0.020\" W (1.00mm x 0.50mm)", Supplier 1=DigiKey
R15 R26 R27 R28: library part RT0402FRE074K7L, "RES SMD 4.7K OHM 1% 1/16W 0402", Device Package="0402 (1005 Metric)", Manufacturer=Yageo, Operating Temperature="-55°C ~ 155°C", Power (Watts)="0.063W, 1/16W", Supplier Device Package=0402, Supplier Part Number 1=YAG3347CT-ND, Temperature Coefficient=±50ppm/°C, Tolerance=±1%, ComponentLink1Description=Datasheet, ComponentLink1URL=https://www.yageo.com/upload/media/product/productsearch/datasheet/rchip/PYu-RT_1-to-0.01_RoHS_L_11.pdf, ComponentLink2Description="DigiKey Link", ComponentLink2URL=https://www.digikey.com/en/products/detail/yageo/RT0402FRE074K7L/1072052, Composition="Thin Film", Height - Seated (Max)="0.014\" (0.35mm)", LastUpdated="8/31/2025 3:04:17 PM", Lifecycle Status=Active, Minimum Order=1, Number of Terminations=2, Package / Case="0402 (1005 Metric)", Packaging=TapeAndReel, Part Number=RT0402FRE074K7L, Part Status=Active, partid=3198, Price=0.01, Resistance="4.7 kOhms", Series=RT, Size / Dimension="0.039\" L x 0.020\" W (1.00mm x 0.50mm)", Supplier 1=DigiKey
R18: library part AC0402JR-071KL, "RES SMD 1K OHM 5% 1/16W 0402", Device Package="0402 (1005 Metric)", Manufacturer=Yageo, Operating Temperature="-55°C ~ 155°C", Power (Watts)="0.063W, 1/16W", Ratings=AEC-Q200, Supplier Device Package=0402, Supplier Part Number 1=YAG3525CT-ND, Temperature Coefficient=±100ppm/°C, Tolerance=±5%, ComponentLink1Description=Datasheet, ComponentLink1URL=https://www.yageo.com/upload/media/product/productsearch/datasheet/rchip/PYu-AC_51_RoHS_L_7.pdf, ComponentLink2Description="DigiKey Link", ComponentLink2URL=https://www.digikey.com/en/products/detail/yageo/AC0402JR-071KL/5895603, Composition="Thick Film", Features="Automotive AEC-Q200, Moisture Resistant", Height - Seated (Max)="0.015\" (0.37mm)", LastUpdated="8/31/2025 3:04:17 PM", Lifecycle Status=Active, Minimum Order=1, Number of Terminations=2, Package / Case="0402 (1005 Metric)", Packaging=CutTape, Part Number=AC0402JR-071KL, Part Status=Active, partid=3403, Price=0.01, Resistance="1 kOhms", Series=AC, Size / Dimension="0.039\" L x 0.020\" W (1.00mm x 0.50mm)", Supplier 1=DigiKey
R21: library part RP73PF1E10KBTD, "RES 10K OHM 0.1% 1/10W 0402", Device Package="0402 (1005 Metric)", Manufacturer="TE Connectivity Passive Product", Operating Temperature="-55°C ~ 155°C", Power (Watts)="0.1W, 1/10W", Supplier Device Package=0402, Supplier Part Number 1=A127415CT-ND, Temperature Coefficient=±25ppm/°C, Tolerance=±0.1%, ComponentLink1Description=Datasheet, ComponentLink1URL=https://www.te.com/commerce/DocumentDelivery/DDEController?Action=srchrtrv&DocNm=1773272&DocType=DS&DocLang=English, ComponentLink2Description="DigiKey Link", ComponentLink2URL=https://www.digikey.com/en/products/detail/te-connectivity-passive-product/RP73PF1E10KBTD/8260957, Composition="Thin Film", Height - Seated (Max)="0.014\" (0.35mm)", LastUpdated="2/9/2024 8:30:24 PM", Lifecycle Status=Active, Minimum Order=1, Number of Terminations=2, Package / Case="0402 (1005 Metric)", Packaging=TapeAndReel, Part Number=RP73PF1E10KBTD, Part Status=Active, partid=2434, Price=0.08, Resistance="10 kOhms", Series="RP73, Holsworthy", Size / Dimension="0.039\" L x 0.020\" W (1.00mm x 0.50mm)", Supplier 1=DigiKey
SW1: library part CMP-011-00008-2, "Tactile Switch, SPST-NO, 50 mA, 12 V, 4-Pin SMD, RoHS, Tape and Reel", Case/Package=TL3342F160QG, Current Rating=50mA, Manufacturer=E-Switch, Max Voltage Rating (DC)=12V, Operating Force=1.6N, Package Description="4-Pin Surface Mount Device, Body 5 x 5 mm, Pitch 6.3 mm", Package Quantity=3000, Contact Material=Silver, Contact Plating=Silver, Datasheet URL=http://spec_sheets.e-switch.com/specs/P010632.pdf, Datasheet Version="Rev. I, 12/2010", Manufacturer URL=http://www.e-switch.ch/en/, Mounting Technology=SM, Package Reference=TL3342F160QG, Packaging=TapeandReel, RoHS Compliant=True, Throw Configuration=SPST, Voltage Rating (DC)=12V
TP2: library part TestPoint-1, "Rounded rectangular pad 1.54mm"
TP4 TP5 TP6 TP7: library part CMP-00001-1, "Test pint THT round via 1.54mm pad 1mm hole"
U1: library part CMP-12175-000010-1, "ACCEL 2-16G I2C/SPI 12LGA", Case/Package=LGA, Max Operating Temperature=85°C, Min Operating Temperature=-40°C, Operating Supply Voltage=1.98V, Axis="X, Y, Z", Bandwidth=6.25Hz, Contact Plating=Gold, Lead Free="Lead Free", Mount="Surface Mount", Number of Pins=12, Output Type=SPI, Packaging="Tape and Reel"
U2: library part CMP-003-000000-1, "Description", Manufacturer_Name="Nordic Semiconductor", Copyright="Copyright (C) 2025 Ultra Librarian. All rights reserved.", Design Item ID=NRF52833-QDAA-R7, Manufacturer_Part_Number=NRF52833-QDAA-R7, RefDes=RefDes, Source=NRF52833-QDAA-R7.SchLib, Type=Type
U3: library part CMP-031-00007-2, "NPM1304 POWER MANAGEMENT IC", Case/Package=None, Check_prices=https://www.snapeda.com/parts/NPM1304-QEAA-R7/Nordic+Power/view-part/?ref=eda, Component Type=Standard, Design Item ID=NPM1304-QEAA-R7, MF="Nordic Semiconductor ASA", MP=NPM1304-QEAA-R7, Pins=33, SnapEDA_Link=https://www.snapeda.com/parts/NPM1304-QEAA-R7/Nordic+Power/view-part/?ref=snap, Source=NPM1304-QEAA-R7.SchLib
U4: library part CMP-226158-000001-1, "Real Time Clock Serial 2byte Clock/Calendar/Alarm/Timer/Battery Backup 8-Pin CSMD T/R", Ambient Temperature Range High=+85°C, Ambient Temperature Range Low=-40°C, Frequency=32.768kHz, Manufacturer="Micro Crystal", Max Supply Voltage=5.5V, Min Supply Voltage=1.1V, Nominal Supply Current=0.04uA, Temperature="-40°C to +85°C", Automotive=No, Category=IC, ComponentLink2Description=Datasheet, ComponentLink2URL=https://www.microcrystal.com/fileadmin/Media/Products/RTC/Datasheet/RV-3028-C7.pdf, Device Class L1="Integrated Circuits (ICs)", Device Class L2="Clock and Timing", Device Class L3="Real Time Clocks", Height=0.8mm, Interface=I2C, Lead Free=Yes, Manufacturer Part Number="RV-3028-C7 32.768kHz 1ppm TA QC", Memory Size=2Bytes, Mouser Description="RV-3028-C7 32.768KHZ 1PPM Ta Qc", Number Of Outputs=1, Octopart=https://octopart.com/rv-3028-c7+32.768khz+1ppm+ta+qc-micro+crystal-98880451, Package="RV-3028-C7 32.768kHz 1ppm TA QC", RoHS=TRUE, Temperature Range High=+85°C, Temperature Range Low=-40°C
U5: library part CMP-015-00012-3, "AS7058 Series 1.8 V PPG/ECG/BioZ/EDA Vital Sign Monitoring IC - WLCSP-42"
U6: library part CMP-019-00050-1, "Flash Memory, Serial NOR, 1 Gbit, 128M x 8bit, QPI, SPI, SOIC, 16 Pins"
U7: library part CMP-015-00011-1, "5A 17V 6V Unidirectional 5.25V SOT-23-6 ESD and Surge Protection (TVS/ESD) ROHS", Case/Package=SOT-23, Max Operating Temperature=125°C, Min Operating Temperature=-40°C, Mounting Technology="Surface Mount", Pins=6
Y1: library part ABM10-32.000MHZ-8-7-A15-T, "CRYSTAL 32.0000MHZ 8PF SMD", Device Package="4-SMD, No Lead", ESR (Equivalent Series Resistance)="70 Ohms", Frequency Stability=±15ppm, Load Capacitance=8pF, Manufacturer="Abracon LLC", Operating Mode=Fundamental, Operating Temperature="-10°C ~ 60°C", Supplier Part Number 1=535-9625-1-ND, ComponentLink1Description=Datasheet, ComponentLink1URL=https://abracon.com/Resonators/ABM10.pdf, ComponentLink2Description="DigiKey Link", ComponentLink2URL=http://digikey.com/product-detail/en/abracon-llc/ABM10-32.000MHZ-8-7-A15-T/535-9625-1-ND/1237092, Frequency=32MHz, Frequency Tolerance=±15ppm, Height - Seated (Max)="0.028\" (0.70mm)", LastUpdated="3/19/2020 10:27:46 PM", Lifecycle Status=Active, Minimum Order=1, Mounting Type="Surface Mount", Package / Case="4-SMD, No Lead", Packaging=TapeAndReel, Part Number=ABM10-32.000MHZ-8-7-A15-T, Part Status=Active, partid=263, Price=0.60, Series=ABM10, Size / Dimension="0.098\" L x 0.079\" W (2.50mm x 2.00mm)", Supplier 1=DigiKey, Type="MHz Crystal"

## Via types
v1: diameter 0.5, hole 0.3, Top Layer to Bottom Layer, 101 vias
v2: diameter 0.25, hole 0.15, Top Layer to Bottom Layer, 13 vias
v3: diameter 0.4, hole 0.2, Top Layer to Bottom Layer, 10 vias
v4: diameter 0.5, hole 0.2, Top Layer to Bottom Layer, 1 vias
v5: diameter 0.3, hole 0.2, Top Layer to Bottom Layer, 1 vias